# Allegro board ex2_rlc.brd
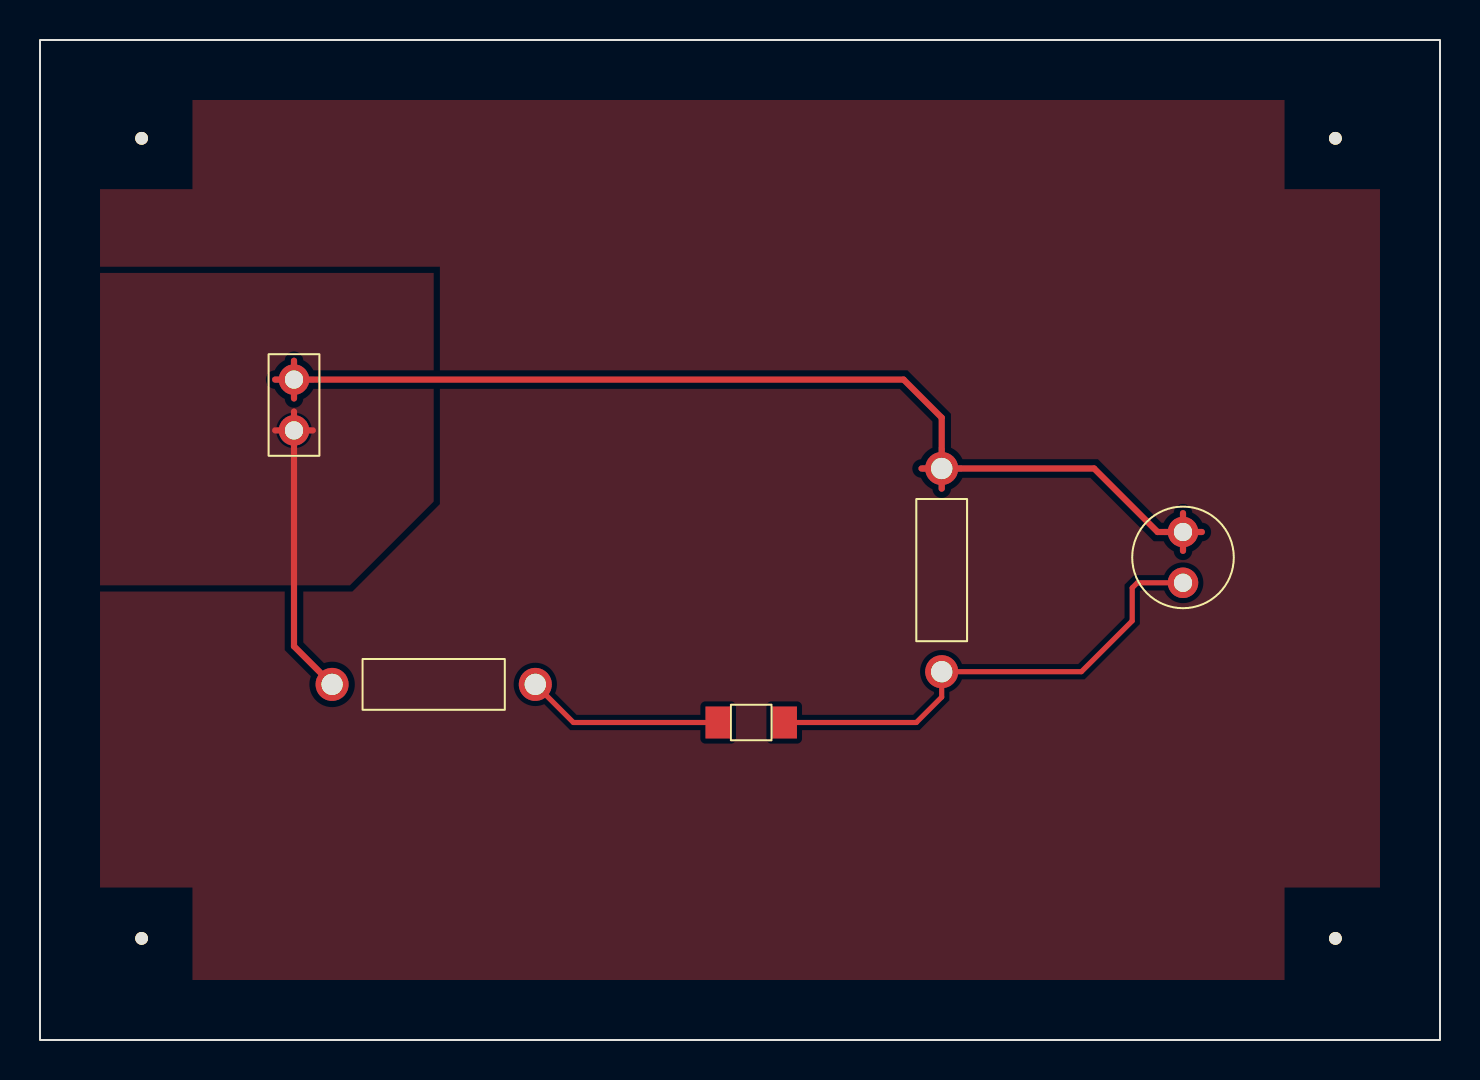
[diagram p0: board, top side]
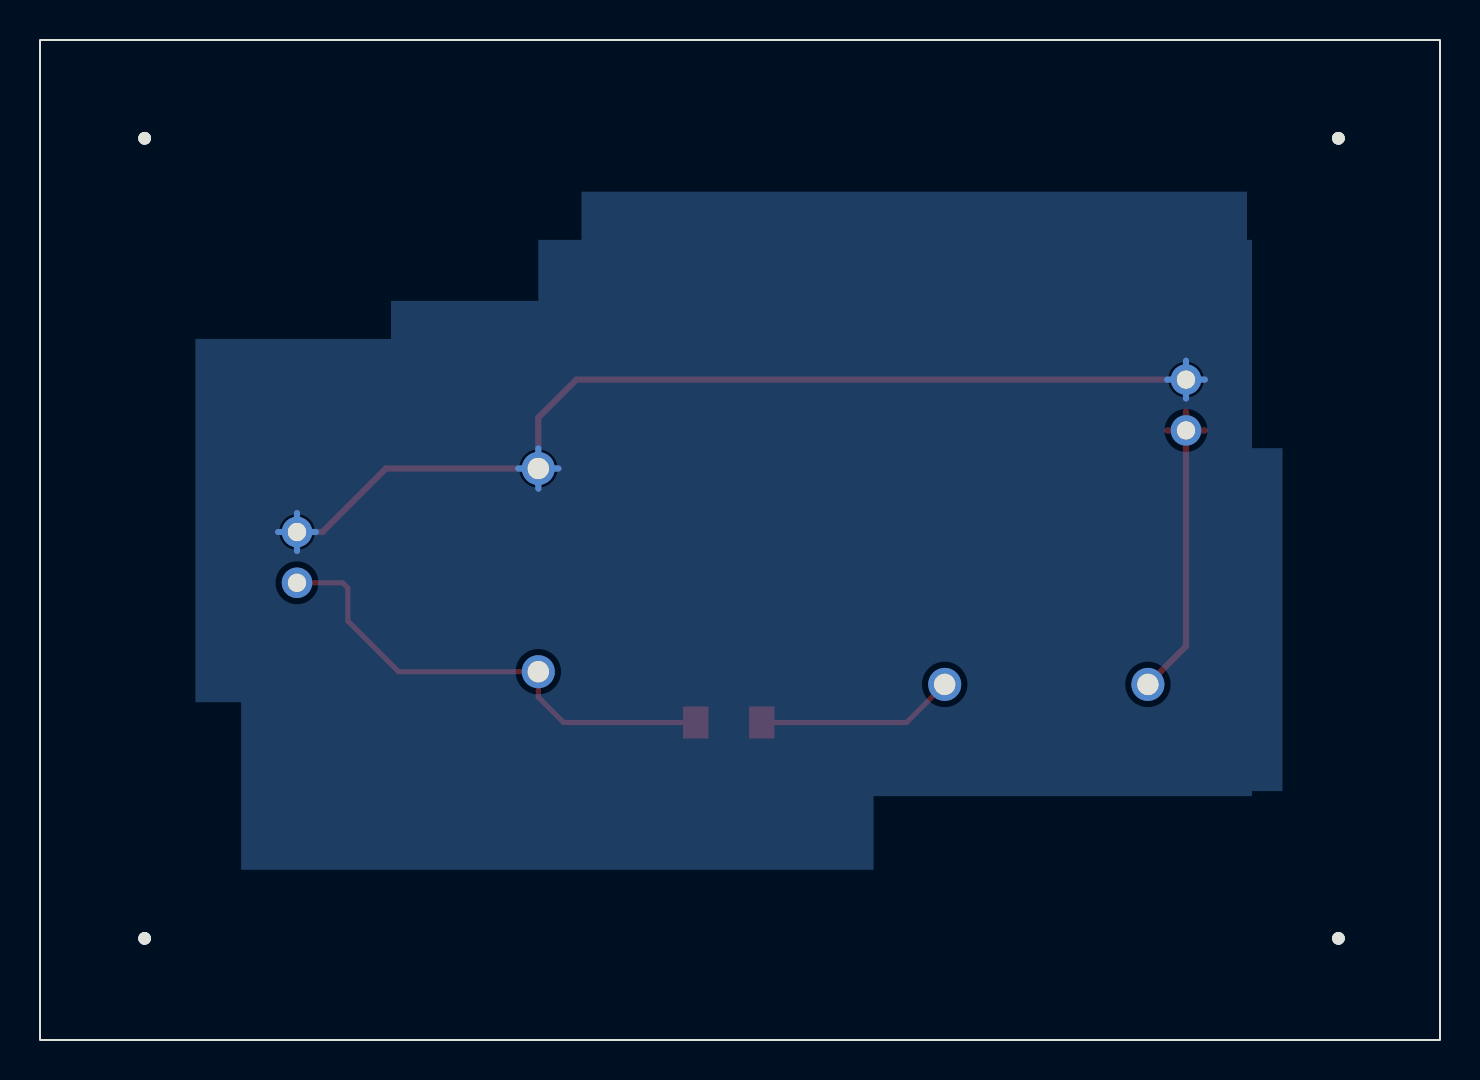
[diagram p1: board, bottom side, seen from below]

Outline 70 x 50 mm; copper layers: TOP, BOTTOM. Coordinates in mm from the lower left corner of the outline.
Outline path: rectangle 0,0 70,50

## Design rules (mm)
constraint set DEFAULT: min track width 0.254
net group POWERNET2: nets KKK N00278

## Placement (name value [footprint] x y rotation side)
C1  1u  [CAP196]  57.15 22.86 0 top
J1  CON2  [JUMPER2]  12.7 33.02 270 top
L1  100n  [SMDRES]  35.56 15.88 0 top
NOREF  -  [unnamed]  5.08 45.09 0 top
NOREF#2  -  [unnamed]  64.77 5.08 0 top
NOREF#3  -  [unnamed]  5.08 5.08 0 top
NOREF#4  -  [unnamed]  64.77 45.09 0 top
R1  330  [RES400]  14.61 17.78 270 top
R2  330  [RES400]  45.09 18.41 0 top

## Library data of the parts
C1 = CAP NP: Tolerance: ***; User Part Number: ***
J1 = CON2: User Part Number: ***
L1 = INDUCTOR: Tolerance: ***; User Part Number: ***
R1 R2 = R: Tolerance: ***; User Part Number: ***

## Footprints (pads in the part's own frame, mm; a bottom-side part is the same pattern mirrored in y, then rotated)
CAP196
  round 1.524 hole 0.914: 1(0,0) 2(0,2.54)
JUMPER2
  round 1.524 hole 0.914: 1(0,0) 2(2.54,0)
RES400
  round 1.651 hole 1.067: 1(0,0) 2(0,10.16)
SMDRES
  rect 1.27x1.6 smd: 1(-1.651,0) 2(1.651,0)
unnamed
  round 0.635 hole 3.175 unplated: (0,0)

## Nets
GND: C1.2 J1.1 R2.2
VCC: J1.2 R1.1
KKK: L1.1 R1.2
N00278: C1.1 L1.2 R2.1

## Routing (per net, layer and track width the routed paths; a pad name or vN(x,y) marks a point on that pad's centre or on a via; arc(x,y) is an arc through that point)
GND: length 68.3
  TOP w0.308: J1.1 43.18,33.02 45.09,31.11 R2.2 ; J1.1 12.7,33.96 ; J1.1 11.76,33.02 ; J1.1 12.7,32.08 ; 57.15,24.46 C1.2 ; C1.2 57.15,26.34 ; C1.2 55.88,25.4 52.7,28.57 R2.2 ; C1.2 58.09,25.4 ; R2.2 45.09,27.57 ; R2.2 44.08,28.57
  BOTTOM w0.308: 56.21,25.4 C1.2 ; C1.2 57.15,24.46 ; C1.2 58.09,25.4 ; C1.2 57.15,26.34 ; R2.2 45.09,29.58 ; R2.2 46.09,28.57 ; R2.2 44.08,28.57 ; R2.2 45.09,27.57 ; J1.1 12.7,33.96 ; J1.1 11.76,33.02 ; J1.1 13.64,33.02 ; J1.1 12.7,32.08
VCC: length 16.3
  TOP w0.308: J1.2 12.7,19.68 R1.1 ; J1.2 12.7,31.42 ; J1.2 13.64,30.48 ; J1.2 11.76,30.48
KKK: length 9.9
  TOP w0.254: R1.2 26.67,15.88 L1.1
N00278: length 24.5
  TOP w0.254: C1.1 54.86,22.86 54.61,22.61 54.61,20.95 52.07,18.41 R2.1 45.09,17.14 43.81,15.88 L1.2

## Copper pours and planes (outline as drawn; the poured copper is in the pictures)
GND on BOTTOM: 9.65,42.42 42.93,42.42 42.93,40.01 45.09,40.01 45.09,36.96 52.45,36.96 52.45,35.05 62.23,35.05 62.23,16.89 59.94,16.89 59.94,8.51 28.32,8.51 28.32,12.19 9.4,12.19 9.4,12.45 7.87,12.45 7.87,29.59 9.4,29.59 9.4,40.01 9.65,40.01
VCC on TOP: 3,38.35 19.68,38.35 19.68,26.92 15.49,22.73 3,22.73
Net_2 on TOP: 3,47 67,47 67,3 3,3

## Text on the board
TOLERANCE_TOP: FIGURE | FINISHED_SIZE | 0.914 | 1.067 | 3.175 | DRILL CHART: TOP to BOTTOM | ALL UNITS ARE IN MILLIMETERS | PLATED | NON-PLATED | QTY | 4
